# Altium PCB PCB1.PcbDoc
Units mil, origin at the board's own origin, x right, y up, seen from the top; angles counter-clockwise.
Board outline 6000 x 4000 mil, 2 copper layers (Top Layer, Bottom Layer); 9 components, 14 nets, 40 pads, 0 vias.
Unrouted connection lines stored in the file: 17.
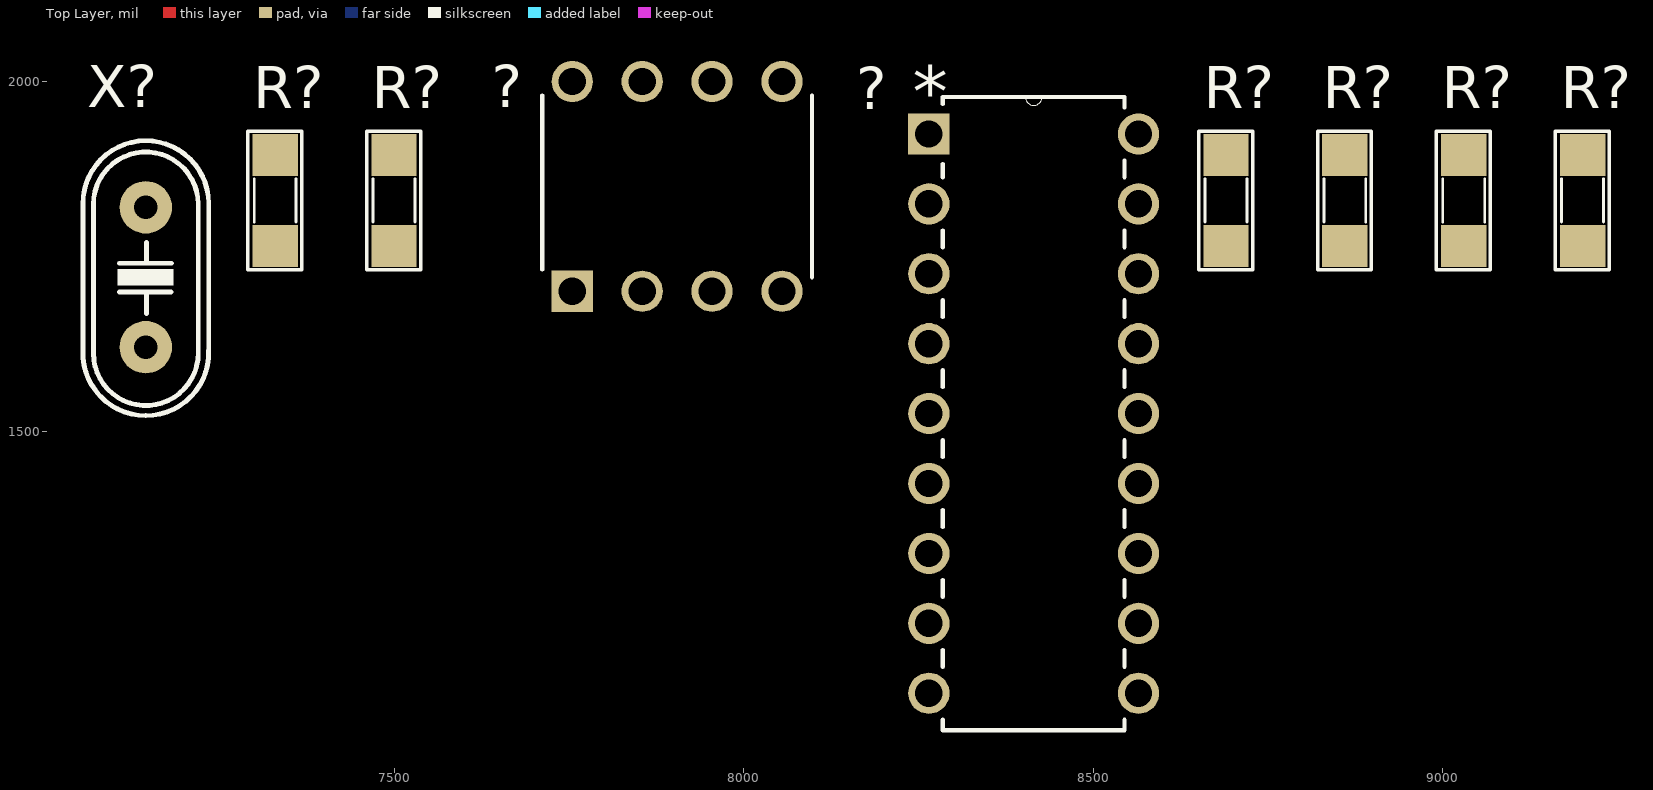
[diagram p0: Top Layer view]
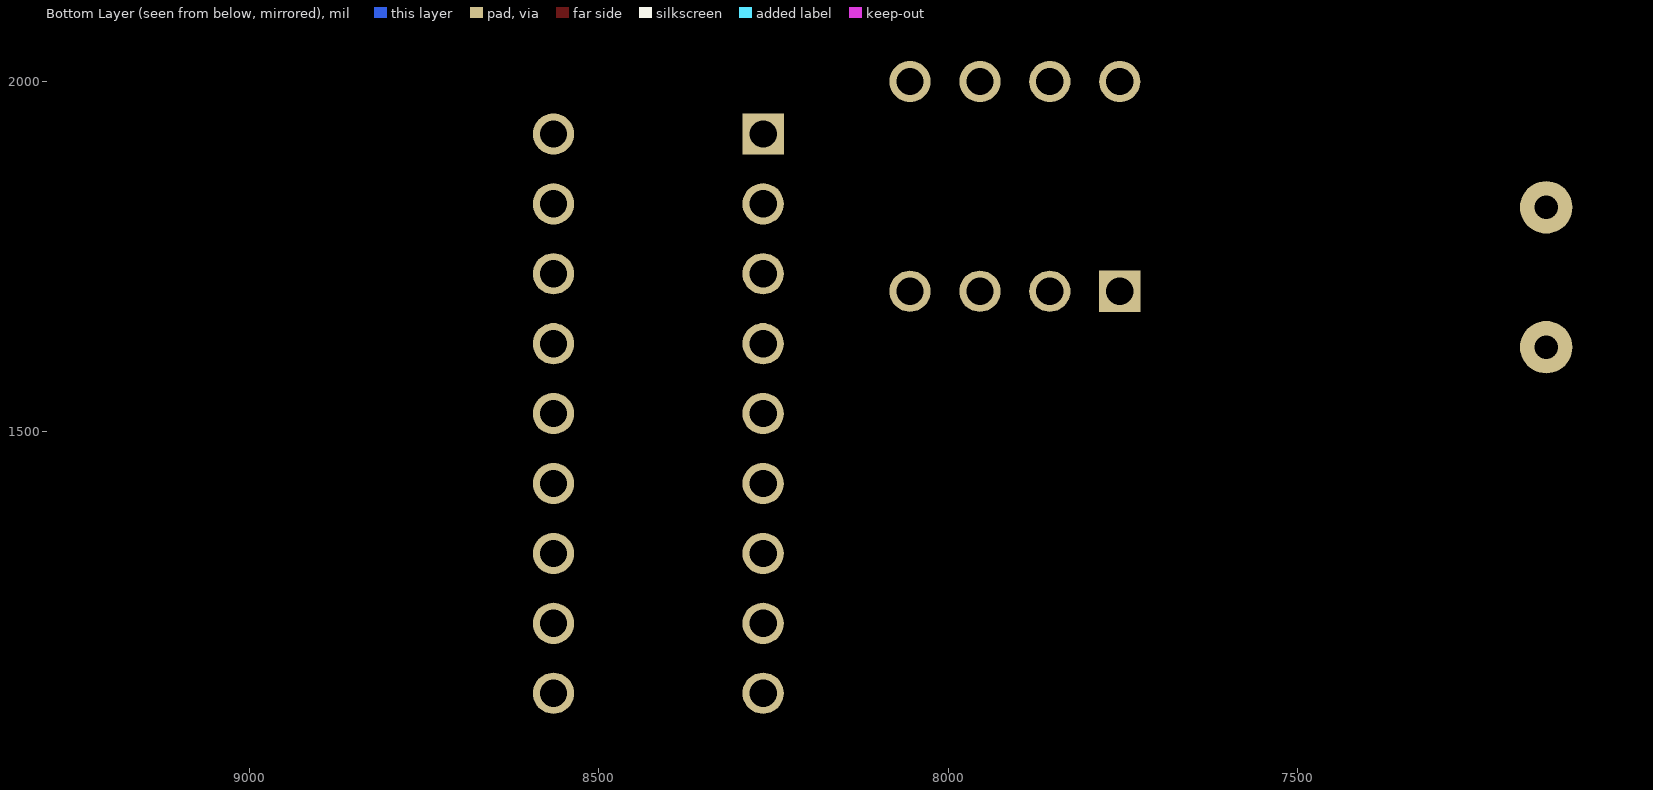
[diagram p1: Bottom Layer view, seen from below]

## Layer stack, top to bottom
Top Solder: solder mask 0.4, Solder Resist, Dk 3.5
Top Layer: signal copper 1.4
Dielectric 1: dielectric 12.6, FR-4, Dk 4.8
Bottom Layer: signal copper 1.4
Bottom Solder: solder mask 0.4, Solder Resist, Dk 3.5

## Board outline
1000,1000 7000,1000 7000,5000 1000,5000

## Design rules (kind name [scope] priority, off if disabled: settings)
Clearance [All] p1: gap=10 ignorepadtopadclearanceinfootprint=FALSE except(0: Arc-Hole Track-Hole SMDPad-Hole THPad-Hole Via-Hole Fill-Hole Poly-Hole Region-Hole Text-Hole)
PolygonConnect [All] p1: connectstyle=Relief reliefconductorwidth=10 reliefentries=4 polygonreliefangle="90 Angle" airgapwidth=10
RoomDefinition Sheet1 [InComponentClass('Sheet1')] p1: confinementstyle=ConfineIn formatcopy=TRUE lockcomponents=FALSE outline 7045,1060 9285,1060 9285,2040 7045,2040
RoutingVias [All] p1: holewidth=28 width=50 viastyle="Through Hole" minholewidth=28 minwidth=50 maxholewidth=28 maxwidth=50
SolderMaskExpansion [All] p1: expansion=4
Width [All] p1: maxlimit=10 minlimit=10 preferedwidth=10
30 further rules are at their usual default settings.

## Classes and differential pairs
component class Sheet1: ? C21 C? R? X?

## Components (designator, comment, footprint, x,y, rotation, side; value= is the part's Value field where it differs from the comment)
? "MCP2551-I/P" *DIP254P762X432-8 8055,2000 r90 top
? "MCP2515-I/P" *DIP254P762X432-18 8565,1125 r0 top
R? "120" SM-RES-1206 7500,1765 r90 top value="R1/4W - 1K"
R? "22K" SM-RES-1206 7330,1765 r90 top value="R1/4W - 1K"
R? "10K" SM-RES-1206 9200,1765 r90 top value="R1/4W - 1K"
R? "4K7" SM-RES-1206 8860,1765 r90 top value="R1/4W - 1K"
R? "4K7" SM-RES-1206 9030,1765 r90 top value="R1/4W - 1K"
R? "4K7" SM-RES-1206 8690,1765 r90 top value="R1/4W - 1K"
X? "16mhZ" XT2 7145,1720 r90 top value=4Mhz

## Footprints (in the part's own frame and the unit in brackets; to place one, negate y for a bottom-side part, rotate by r counter-clockwise, add the part's x,y. Pads: shape width x height; smd on the part's side, far side on the other; paste and mask are expansions set on the pad)
*DIP254P762X432-8 [mil]
  rect 59x59 hole 39: 1(-300,300)
  round 59 hole 39: 2(-300,200) 3(-300,100) 4(-300,0) 5(0,0) 6(0,100) 7(0,200) 8(0,300)
  silkscreen extent -280,-43 -20,343
*DIP254P762X432-18 [mil]
  rect 59x59 hole 39: 1(-300,800)
  round 59 hole 39: 2(-300,700) 3(-300,600) 4(-300,500) 5(-300,400) 6(-300,300) 7(-300,200) 8(-300,100) 9(-300,0) 10(0,0) 11(0,100) 12(0,200) 13(0,300) 14(0,400) 15(0,500) 16(0,600) 17(0,700) 18(0,800)
  silkscreen extent -280,-53 -20,853
SM-RES-1206 [mil]
  rect 60x65 smd: 1(0,0) 2(130,0)
  silkscreen extent -34,-38 164,39, body extent 2,-31 128,32, height 40
XT2 [mil] "Footpin for Crystal 2 pin"
  round 75 hole 34: 1(-100,0) 2(100,0)
  silkscreen extent -198,-90 195,90, body extent -233,-93 213,90, height 138

## Part data
?: "MCP2551 Series 5.5 V 1 Mb/s Surface Mount High-Speed CAN Transceiver - PDIP-8", Package="DIP-8 Microchip", Availability=Unavailable, MF=Microchip, MP=MCP2551-I/P, Price=None, SnapEDA_Link=https://www.snapeda.com/parts/MCP2551-I/P/Microchip/view-part/?ref=snap
?: "MCP2515 Series 5.5 V 1 Mb/s Stand Alone SPI Interface CAN Controller - PDIP-18", Package="DIP-18 Microchip", Availability=Unavailable, MF=Microchip, MP=MCP2515-I/P, Price=None, SnapEDA_Link=https://www.snapeda.com/parts/MCP2515-I/P/Microchip/view-part/?ref=snap
R? R? R? R? R? R?: library part R, "Resistor 1/4W"
X?: library part XT2, "Crystal For all Crystal 2pin."

## Nets (pads, with @x,y where several pads share a name; then routed paths per layer and width w, separated by ;. In a path a pad name is that pad's centre, name@x,y a point inside that pad or via, vN(x,y) a via of type N, cw(c..) or ccw(c..) an arc to the next point about the centre after c; other vN are vias at no path point)
+3V3: ?.18 R?.2@8690,1895 R?.2@8860,1895 R?.2@9030,1895
+5V: ?.3@7955,1700
GND: ?.2@7855,1700 ?.8@7755,2000 ?.9 R?.1@7330,1765
Net?_1: ?.1
Net?_2: ?.2@8265,1825 R?.2@9200,1895
Net?_4: ?.4@8055,1700 R?.1@9200,1765 R?.2@7330,1895
Net?_6: ?.6@7955,2000 R?.2@7500,1895
Net?_7: ?.7@8265,1325 X?.2
Net?_8: ?.8@8265,1225 X?.1
Net?_12: ?.12 ?.13 R?.1@9030,1765
Net?_14: ?.14
Net?_15: ?.15
Net?_16: ?.16 R?.1@8690,1765
Net?_17: ?.17 R?.1@8860,1765
pads on no net: ?.3@8265,1725 ?.4@8265,1625 ?.5 ?.6@8265,1425 ?.7@7855,2000 ?.10 ?.11 R?.1@7500,1765

## Text inside footprints (layer, text, board x,y; h text height)
?: Mechanical 4 "*" at 8242,1949.16 h73.82; Mechanical 4 "*" at 8242,1949.16 h73.82; Top Overlay "*" at 8242,1949.16 h73.82